# Altium PCB PCB_HBridge.PcbDoc
Units mm, origin at the board's own origin, x right, y up, seen from the top; angles counter-clockwise.
Board outline 66.04 x 61.85 mm, 2 copper layers (Top Layer, Bottom Layer); 56 components, 32 nets, 159 pads, 106 vias.
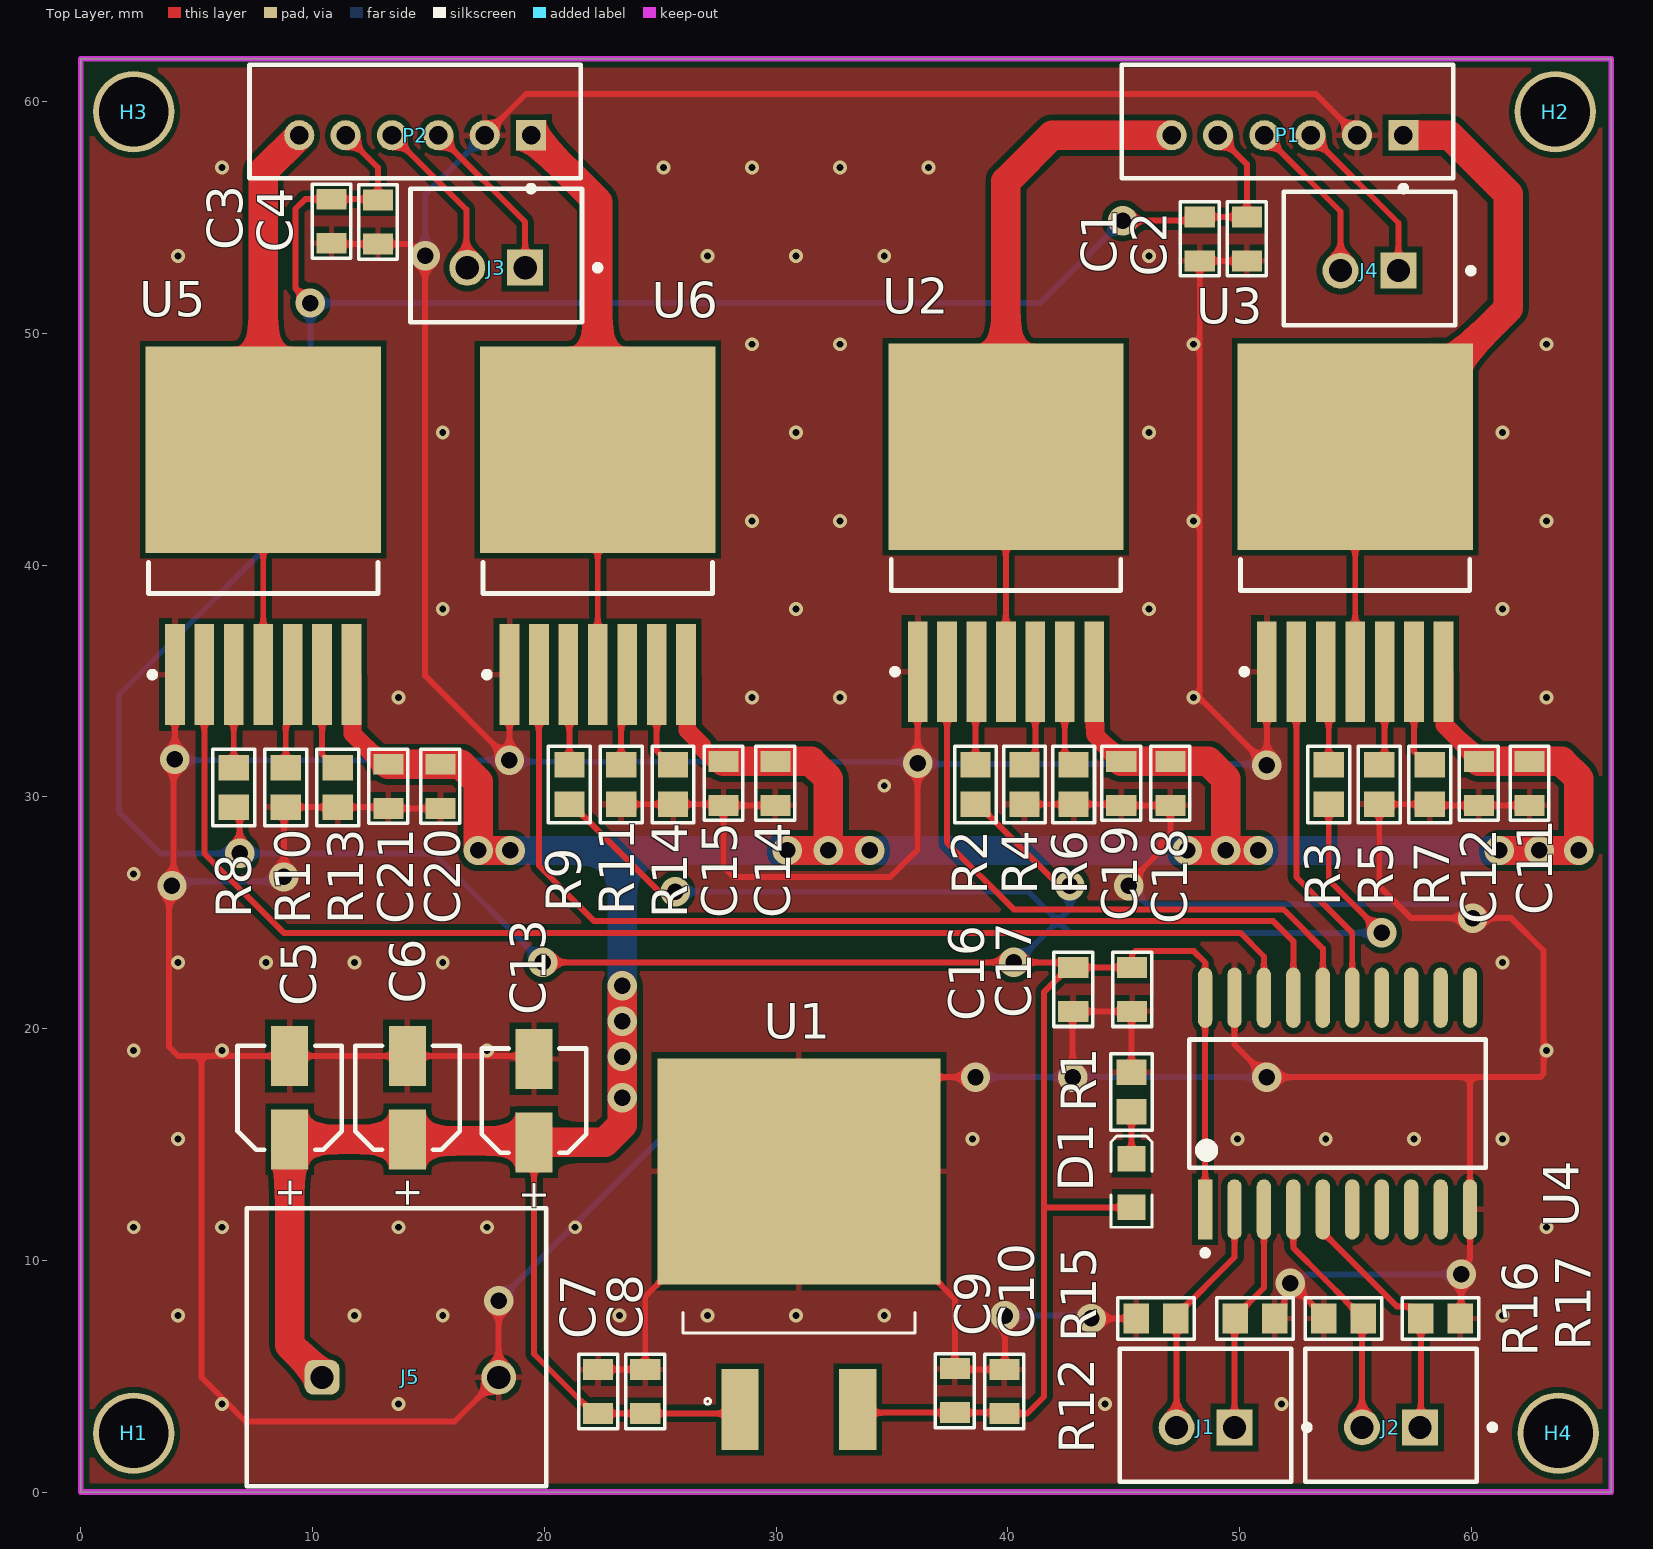
[diagram p0: Top Layer view]
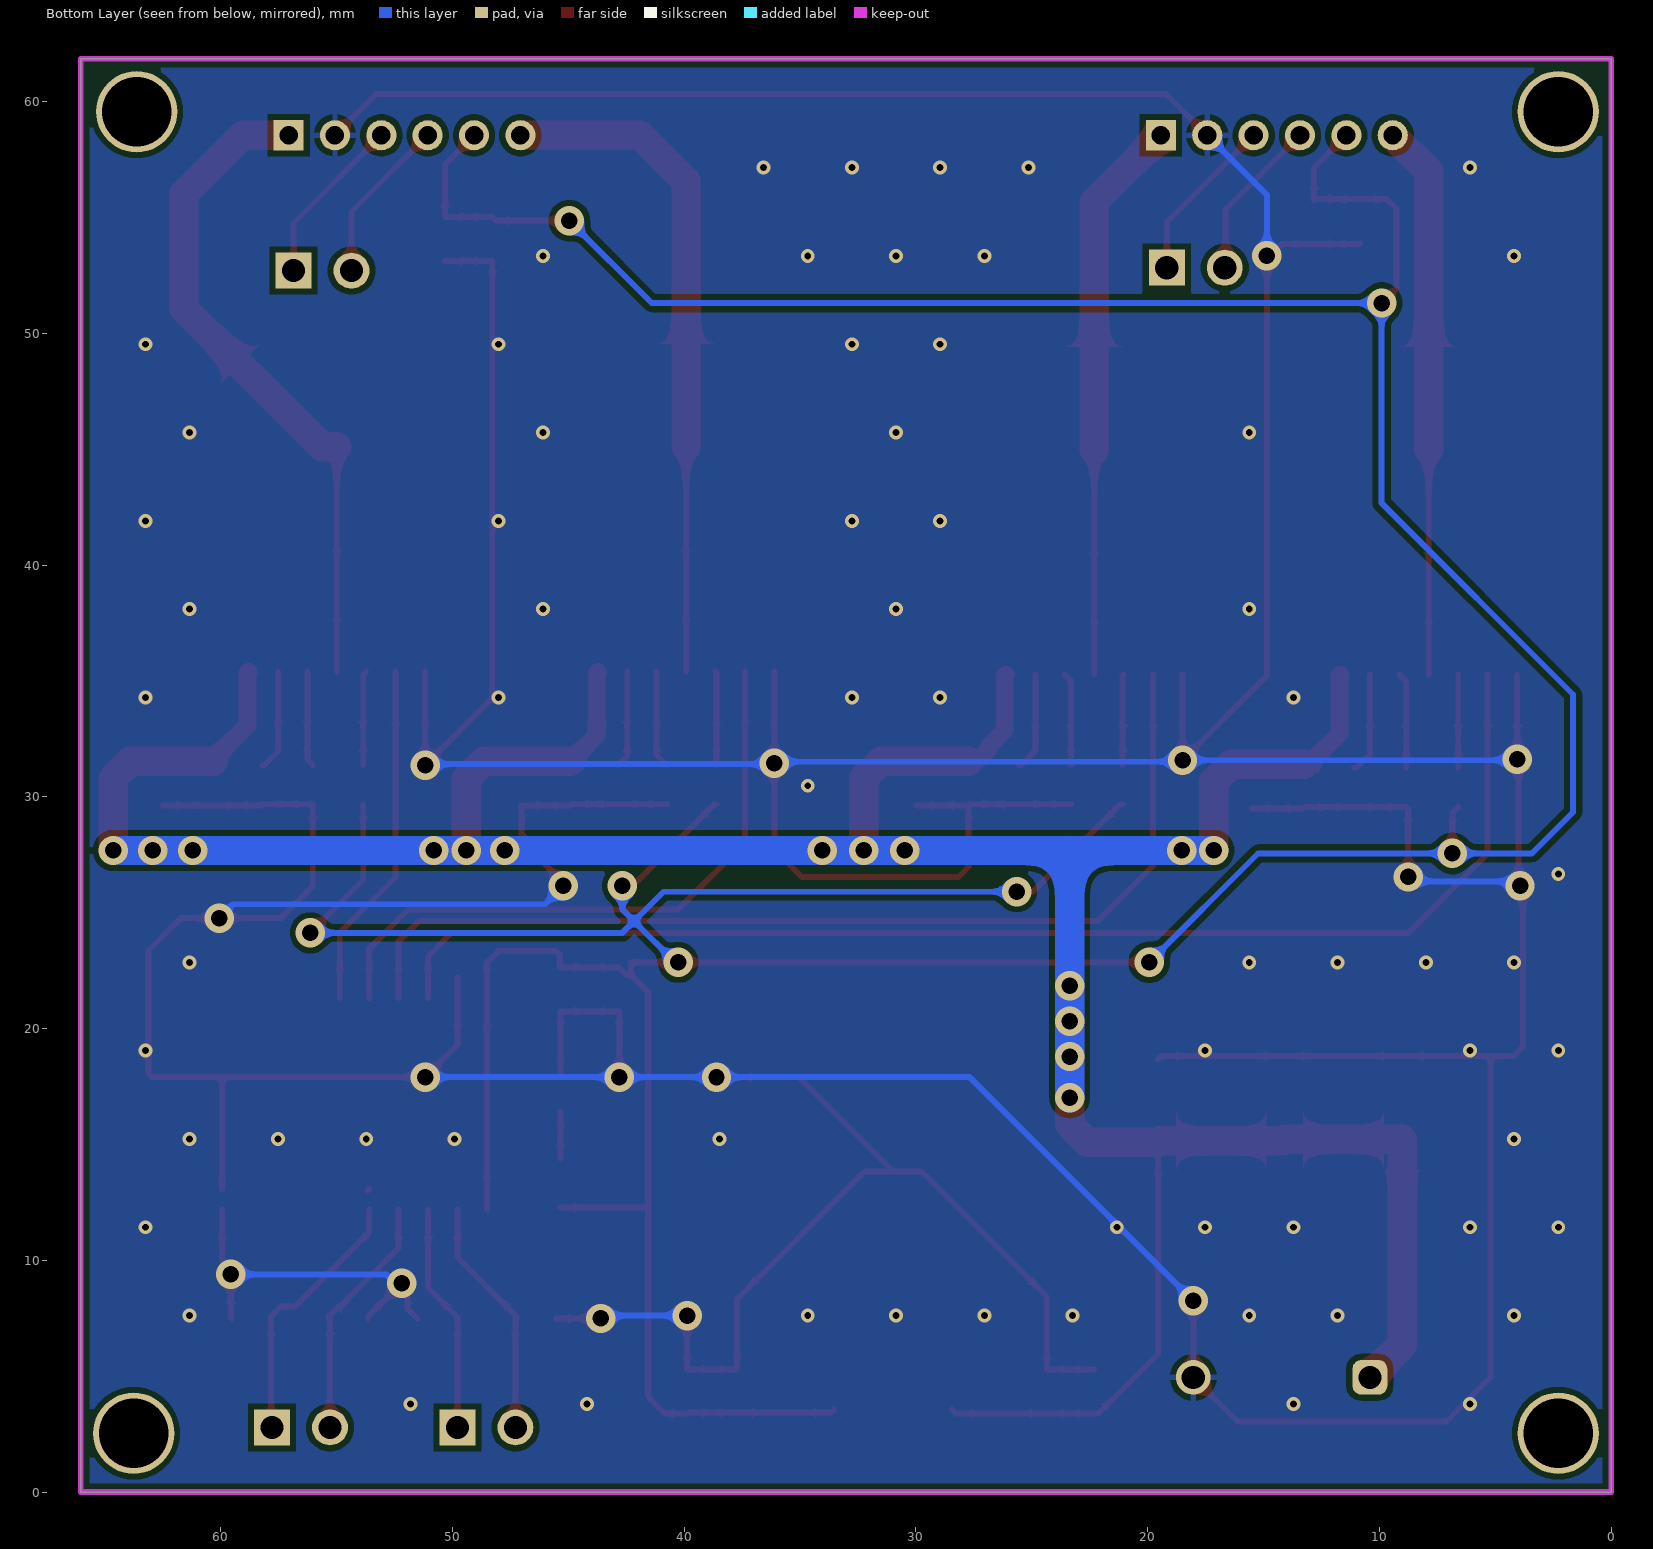
[diagram p1: Bottom Layer view, seen from below]
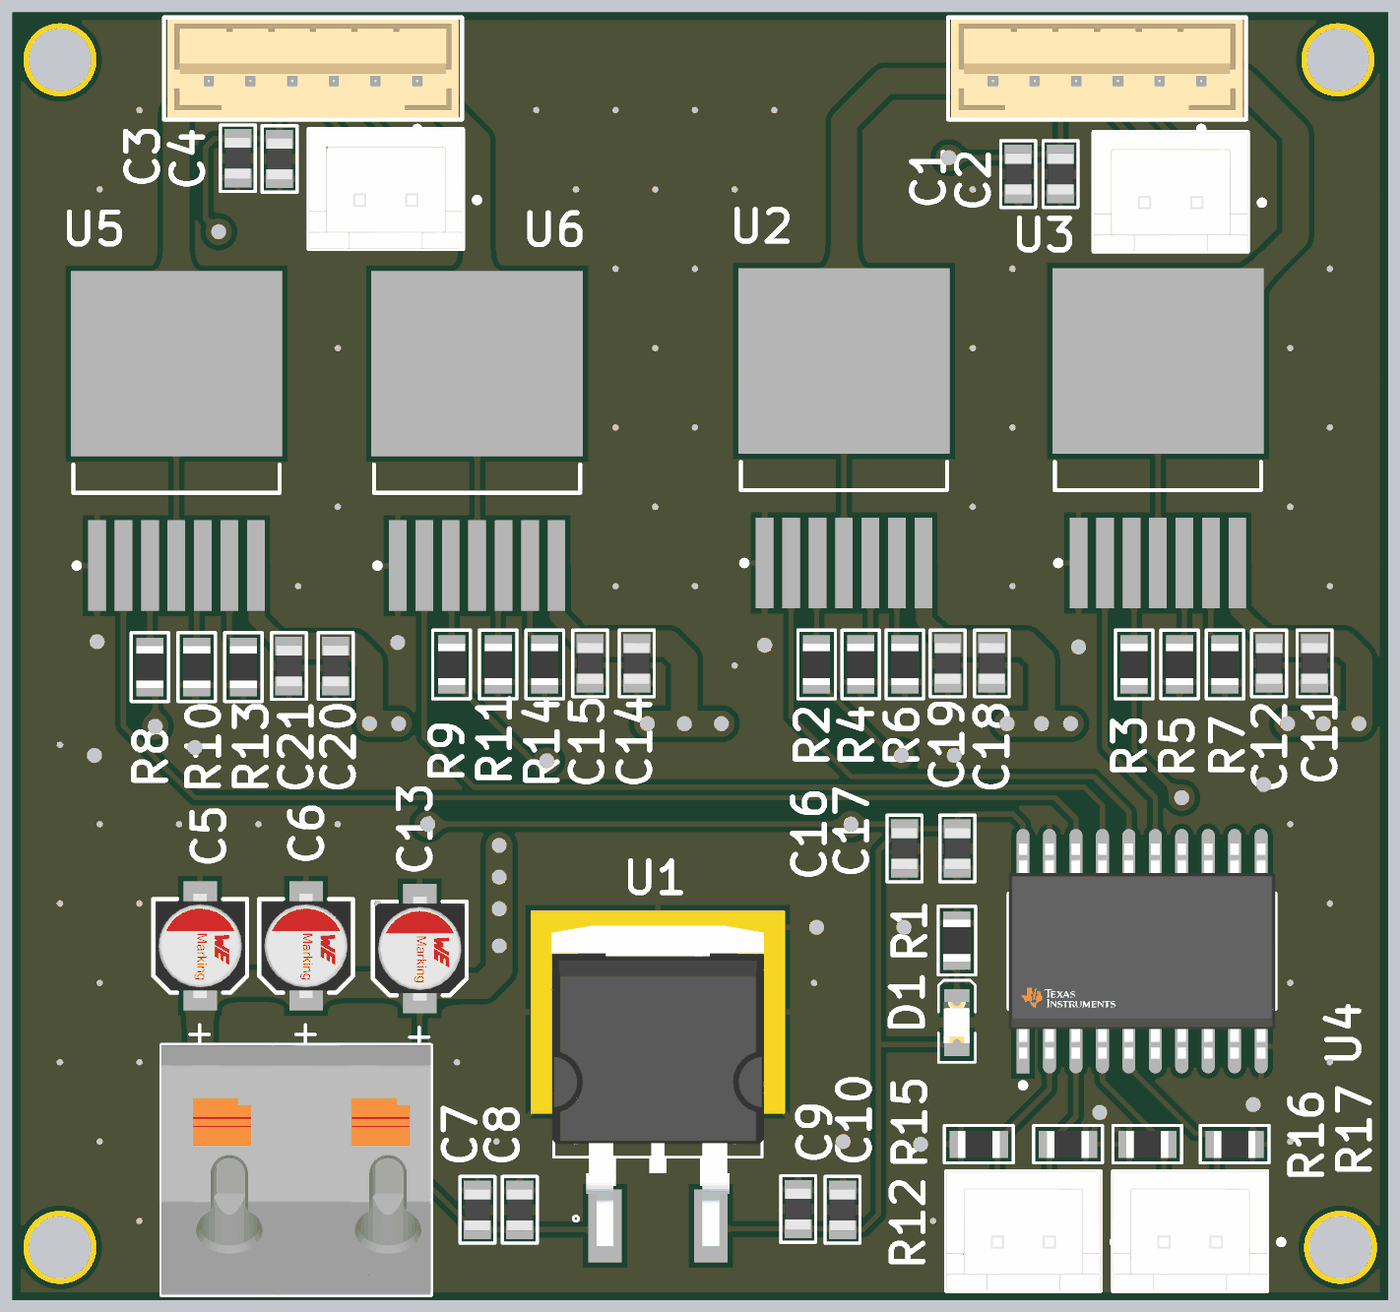
[diagram p2: 3D render of the assembled board from above, using the file's embedded part models]

## Layer stack, top to bottom
Top Solder: solder mask 0.0102, Solder Resist, Dk 3.5
Top Layer: signal copper 0.0356
Dielectric 1: dielectric 0.32, FR-4, Dk 4.8
Bottom Layer: signal copper 0.0356
Bottom Solder: solder mask 0.0102, Solder Resist, Dk 3.5

## Board outline
0,0 0,61.849 66.04,61.849 66.04,0

## Design rules (kind name [scope] priority, off if disabled: settings)
Clearance [All] p1: gap=0.254 ignorepadtopadclearanceinfootprint=FALSE except(0: Arc-Hole Track-Hole SMDPad-Hole THPad-Hole Via-Hole Fill-Hole Poly-Hole Region-Hole Text-Hole)
HoleSize [All] p1: absolutevalues=TRUE maxlimit=0.3 minlimit=0.025 maxpercent=80.000 minpercent=20.000
PolygonConnect [All] p1: thpad.connectstyle=Relief thpad.reliefconductorwidth=0.254 thpad.reliefentries=4 thpad.polygonreliefangle="90 Angle" thpad.airgapwidth=0.254 smdpad.connectstyle=Relief smdpad.reliefconductorwidth=0.254 smdpad.reliefentries=4 smdpad.polygonreliefangle="90 Angle" smdpad.airgapwidth=0.254 via.connectstyle=Direct via.reliefconductorwidth=0.254 via.reliefentries=4 via.polygonreliefangle="90 Angle" via.airgapwidth=0.254
RoutingVias [All] p1: holewidth=0.711 width=1.27 viastyle="Through Hole" minholewidth=0.711 minwidth=1.27 maxholewidth=0.711 maxwidth=1.27
SolderMaskExpansion Via [IsVia] p1: expansion=0.102 istentingtop=TRUE
Width [All] p1: maxlimit=1.27 minlimit=0.254 preferedwidth=0.762 bottomlayer_prefwidth=0.254 minimp=50.000000 maximp=50.000000 favimp=50.000000
29 further rules are at their usual default settings.

## Components (designator, comment, footprint, x,y, rotation, side; value= is the part's Value field where it differs from the comment)
C1 "1 uF, 25 VDC" CAP_0805 48.26,54.102 r90 top
C2 "100 nF, 50 VDC" CAP_0805 50.292,54.102 r90 top value="0.1 nF, 50 VDC"
C3 "1 uF, 25 VDC" CAP_0805 10.795,54.864 r90 top
C4 "100 nF, 50 VDC" CAP_0805 12.802,54.828 r90 top value="0.1 nF, 50 VDC"
C5 "470nF" WCAP-ASLU_D4H5.5 9.017,17.018 r270 top
C6 "4.7uF, 50V" WCAP-ASLI_D4H5.5 14.097,17.018 r270 top
C7 "1 uF, 25 VDC" CAP_0805 22.352,4.318 r270 top
C8 "100 nF, 50 VDC" CAP_0805 24.384,4.318 r270 top value="0.1 nF, 50 VDC"
C9 "1 uF, 25 VDC" CAP_0805 37.744,4.354 r270 top
C10 "100 nF, 50 VDC" CAP_0805 39.878,4.318 r270 top value="0.1 nF, 50 VDC"
C11 "1 uF, 25 VDC" CAP_0805 62.484,30.607 r90 top
C12 "100 nF, 50 VDC" CAP_0805 60.303,30.607 r90 top value="0.1 nF, 50 VDC"
C13 "4.7uF, 50V" WCAP-ASLI_D4H5.5 19.558,16.891 r270 top
C14 "1 uF, 25 VDC" CAP_0805 29.947,30.607 r90 top
C15 "100 nF, 50 VDC" CAP_0805 27.709,30.607 r90 top value="0.1 nF, 50 VDC"
C16 "1 uF, 25 VDC" CAP_0805 42.799,21.717 r90 top
C17 "100 nF, 50 VDC" CAP_0805 45.339,21.717 r90 top value="0.1 nF, 50 VDC"
C18 "1 uF, 25 VDC" CAP_0805 46.99,30.607 r90 top
C19 "100 nF, 50 VDC" CAP_0805 44.873,30.607 r90 top value="0.1 nF, 50 VDC"
C20 "1 uF, 25 VDC" CAP_0805 15.494,30.48 r90 top
C21 "100 nF, 50 VDC" CAP_0805 13.25,30.48 r90 top value="0.1 nF, 50 VDC"
D1 "LED SMD" LED_0805_Blue 45.339,13.335 r90 top
H1 "Hole" "LO KHOAN 3MM" 2.286,2.54 r0 top
H2 "Hole" "LO KHOAN 3MM" 63.627,59.563 r0 top
H3 "Hole" "LO KHOAN 3MM" 2.286,59.563 r0 top
H4 "Hole" "LO KHOAN 3MM" 63.754,2.54 r0 top
J1 "B2B-XH-A(LF)(SN)" FP-B2B-XH-A_LF_SN-MFG 48.534,3.319 r180 top
J2 "B2B-XH-A(LF)(SN)" FP-B2B-XH-A_LF_SN-MFG 56.535,3.319 r180 top
J3 "B2B-XH-A(LF)(SN)" FP-B2B-XH-A_LF_SN-MFG 17.927,53.357 r180 top
J4 "B2B-XH-A(LF)(SN)" FP-B2B-XH-A_LF_SN-MFG 55.606,53.23 r180 top
J5 "4A, 300V" 691418420002 13.629,6.253 r0 top
P1 "2A, 125V(AC)" 62000611622 52.07,59.147 r0 top
P2 "2A, 125V(AC)" 62000611622 14.431,59.147 r0 top
R1 "1 KOhm, 1/8 W" RESISTOR_0805 45.339,17.272 r90 top
R2 "1 KOhm, 1/8 W" RESISTOR_0805 38.608,30.532 r270 top
R3 "1 KOhm, 1/8 W" RESISTOR_0805 53.848,30.532 r270 top
R4 "1 KOhm, 1/8 W" RESISTOR_0805 40.725,30.532 r270 top
R5 "1 KOhm, 1/8 W" RESISTOR_0805 56.029,30.532 r270 top
R6 "1 KOhm, 1/8 W" RESISTOR_0805 42.843,30.532 r270 top
R7 "1 KOhm, 1/8 W" RESISTOR_0805 58.21,30.532 r270 top
R8 "1 KOhm, 1/8 W" RESISTOR_0805 6.604,30.405 r270 top
R9 "1 KOhm, 1/8 W" RESISTOR_0805 21.082,30.532 r270 top
R10 "1 KOhm, 1/8 W" RESISTOR_0805 8.848,30.405 r270 top
R11 "1 KOhm, 1/8 W" RESISTOR_0805 23.32,30.532 r270 top
R12 "1 KOhm, 1/8 W" RESISTOR_0805 46.394,7.493 r0 top
R13 "1 KOhm, 1/8 W" RESISTOR_0805 11.093,30.405 r90 top
R14 "1 KOhm, 1/8 W" RESISTOR_0805 25.558,30.532 r90 top
R15 "1 KOhm, 1/8 W" RESISTOR_0805 50.673,7.493 r180 top
R16 "1 KOhm, 1/8 W" RESISTOR_0805 54.483,7.493 r0 top
R17 "1 KOhm, 1/8 W" RESISTOR_0805 58.674,7.493 r180 top
U1 "5V, 1.5A" TO-263 30.988,10.268 r90 top
U2 "BTS7960B" INF-P-TO-263-7-6_M 39.92,41.402 r90 top
U3 "BTS7960B" INF-P-TO-263-7-6_M 54.991,41.402 r90 top
U4 "SN74HC245DWR" FP-DW0020A-IPC_A 54.229,16.764 r90 top
U5 "BTS7960B" INF-P-TO-263-7-6_M 7.874,41.275 r90 top
U6 "BTS7960B" INF-P-TO-263-7-6_M 22.31,41.275 r90 top

## Footprints (in the part's own frame and the unit in brackets; to place one, negate y for a bottom-side part, rotate by r counter-clockwise, add the part's x,y. Pads: shape width x height; smd on the part's side, far side on the other; paste and mask are expansions set on the pad)
62000611622 [mm] "2.00mm Male Vertical Shrouded Header, 6p"
  rect 1.3x1.3 hole 0.8: 1(5,-0.6)
  round 1.3 hole 0.8: 2(3,-0.6) 3(1,-0.6) 4(-1,-0.6) 5(-3,-0.6) 6(-5,-0.6)
  silkscreen extent -7.15,-3.02 7.15,2.45, body extent -7,-2.35 7,2.35, height 6.13
691418420002 [mm] "7.62 mm 45deg Entry Screwless, 2p"
  rrect50% 1.5x1.5 hole 1: 1(-3.215,-1.3)
  round 1.5 hole 1: 2(4.405,-1.3)
  silkscreen extent -6.47,-6 6.46,6, body extent -6.46,-6 6.47,6, height 13.28
CAP_0805 [mm]
  rect 0.9x1.3 smd: 1(-0.975,-0.025) 2(0.925,-0.025)
  silkscreen extent -1.63,-0.86 1.57,0.81, body extent -1.03,-0.65 0.97,0.6, height 0.6
FP-B2B-XH-A_LF_SN-MFG [mm]
  rect 1.55x1.55 hole 1 paste-1000 mask+0: 1(-1.25,0.525)
  round 1.55 hole 1 paste-1000 mask+0: 2(1.25,0.525)
  silkscreen extent -4.5,-2.88 3.7,2.88, body extent -3.8,-2.98 3.8,2.98, height 0.25
FP-DW0020A-IPC_A [mm]
  rect 2.603x0.622 smd paste+0 mask+0: 1(-4.565,5.715)
  rrect100% 2.603x0.622 smd paste+0 mask+0: 2(-4.565,4.445) 3(-4.565,3.175) 4(-4.565,1.905) 5(-4.565,0.635) 6(-4.565,-0.635) 7(-4.565,-1.905) 8(-4.565,-3.175) 9(-4.565,-4.445) 10(-4.565,-5.715) 11(4.565,-5.715) 12(4.565,-4.445) 13(4.565,-3.175) 14(4.565,-1.905) 15(4.565,-0.635) 16(4.565,0.635) 17(4.565,1.905) 18(4.565,3.175) 19(4.565,4.445) 20(4.565,5.715)
  silkscreen extent -6.57,-6.4 2.76,6.4, body extent -6.37,-6.9 6.37,6.9, height 0.25
INF-P-TO-263-7-6_M [mm] "DPAK, 7-Leads, Body 9.9x9.2mm, Pitch 1.27mm, IPC Low Density"
  rect 4.35x0.85 smd: 1(-6,3.81) 2(-6,2.54) 3(-6,1.27) 4(-6,0) 5(-6,-1.27) 6(-6,-2.54) 7(-6,-3.81)
  rect 8.9x10.15 smd: 8(3.7,0)
  silkscreen extent -6.12,-4.95 -1.15,4.95, body extent -2.5,-4.95 6.9,4.95, height 4.5
LED_0805_Blue [mm]
  rect 1.1x1.2 smd: 1(-1.05,0) 2(1.05,0)
  silkscreen extent -1.91,-0.89 2.03,0.89, body extent -1,-0.63 1,0.62, height 0.68
"LO KHOAN 3MM" [mil]
  round 138 hole 118.1: 1(0,0)
RESISTOR_0805 [mm] "Chip Resistor, 2-Leads, Body 2,00x1,20mm, IPC Medium Density"
  rect 1.1x1.3 smd: 1(-0.85,0) 2(0.85,0)
  silkscreen extent -1.65,-0.9 1.65,0.9, body extent -1,-0.65 1,0.65, height 0.45
TO-263 [mm] "D2PAK"
  rect 3.5x1.6 smd: 1(-6.7,2.54) 2(-6.7,-2.54)
  rect 9.75x12.2 smd paste-7: 3(3.575,0)
  silkscreen extent -6.48,-5 -2.51,5, body extent -7.71,-5.1 7.71,5.1, height 4.6
WCAP-ASLI_D4H5.5 [mm] "Aluminium Electrolytic V-Chip SMT Capacitors, 4x5.5mm"
  rect 2.6x1.6 smd: 1(1.8,0) 2(-1.8,0)
  silkscreen extent -2.25,-2.25 2.25,2.25, body extent -2.5,-2.15 2.5,2.15, height 5.5
WCAP-ASLU_D4H5.5 [mm] "Aluminum Electrolytic Capacitors, body diameter 4mm"
  rect 2.6x1.6 smd: 1(1.8,0) 2(-1.8,0)
  silkscreen extent -2.25,-2.25 2.25,2.25, body extent -2.5,-2.15 2.5,2.15, height 5.5

## Part data
C1 C3 C7 C9 C11 C14 C16 C18 C20: library part 0108051051025, "CAP, size 0805, 1 uF, 25 VDC", Capacitance="1 uF", Manufacture Name=TDK, Manufacture SN=CGA4J1X8R1E105K125AE, Operating Temperature="-55 to +125degC", Tolerance=+/-10%, Voltage Rating DC="25 VDC", ComponentLink2Description=Datasheet, ComponentLink2URL=https://product.tdk.com/system/files/dam/doc/product/capacitor/ceramic/mlcc/catalog/mlcc_automotive_soft_en.pdf?ref_disty=mouser, Mounting Technology=SMT, Packaging="Tape and Reel", Size=0805, Supplier 1 Name=Mouser, Supplier 1 SN=810-A4J1X815K125AE, Supplier 1 URL=https://www.mouser.vn/ProductDetail/TDK/CGA4J1X8R1E105K125AE?qs=Ii670aiJhr6VRhkBsruYJg%3D%3D&utm_source=mouser-refine-download&utm_medium=file&utm_campaign=CGA4J1X8R1E105K125AE&utm_content=TDK, Supplier 2 Name=Digi-Key, Supplier 2 SN=445-174807-2-ND, Supplier 2 URL=https://www.digikey.com/en/products/detail/tdk-corporation/cga4j1x8r1e105k125ae/6556490, Supplier 3 Name=thegioiic, Supplier 3 SN=OEM, Supplier 3 URL=N/A
C2 C4 C8 C10 C12 C15 C17 C19 C21: library part 0108051041050, "CAP, size 0805, 100 nF, 50 VDC", Capacitance="0.1 nF", Manufacture Name=TDK, Manufacture SN=CGA4J2X8R1H104K125AD, Operating Temperature="-55 to +125degC", Tolerance=+/-10%, Voltage Rating DC="50 VDC", ComponentLink2Description=Datasheet, ComponentLink2URL=https://product.tdk.com/system/files/dam/doc/product/capacitor/ceramic/mlcc/catalog/mlcc_automotive_epoxy_en.pdf?ref_disty=mouser, Mounting Technology=SMT, Packaging="Tape and Reel", Size=0805, Supplier 1 Name=Mouser, Supplier 1 SN=810-C2012X8R1H104KEP, Supplier 1 URL=https://www.mouser.vn/ProductDetail/TDK/CGA4J2X8R1H104K125AD?qs=LcTL%2F5vFEzExqZqv3rh1qQ%3D%3D&utm_source=mouser-refine-download&utm_medium=file&utm_campaign=CGA4J2X8R1H104K125AD&utm_content=TDK, Supplier 2 Name=Digi-Key, Supplier 2 SN=445-8810-2-ND, Supplier 2 URL=https://www.digikey.com/en/products/detail/tdk-corporation/cga4j2x8r1h104k125ad/3248169, Supplier 3 Name=thegioiic, Supplier 3 SN=OEM, Supplier 3 URL=N/A
C5: library part CMP-03913-53914652-1, "865090640004 WCAP-ASLU Aluminum Electrolytic Capacitors", Case/Package=Radial, Insulation Resistance=16.6667MΩ, Leakage Current=400nA, Max Operating Temperature=85°C, Min Operating Temperature=-40°C, Ripple Current=4mA, Tolerance=20%, Voltage Rating=50V, Capacitance=470nF, Diameter=4mm, Height=5.5mm, Height - Seated (Max)=5.5118mm, Length=5.5mm, Life (Hours)=1000hours, Material=Aluminium, Mount="Surface Mount", NexarPartId=53914652, Packaging="Tape & Reel (TR)", Polarity=Polar, REACH SVHC=Unknown, Ripple Current (AC)=4mA, RoHS=Compliant, Voltage Rating (DC)=50V, Width=4.3mm
C6 C13: library part 865080640004, "V-Chip, D4 x H5.5mm, 4.7uF, 50V", Capacitance=4.7uF, Capacitance Tolerance=+/-20%, Leakage Current=3uA, Manufacturer="Wurth Elektronik", Manufacturer Part Number=N/A, Operating Temperature Max=105°C, Operating Temperature Min=-55°C, Rated Voltage (DC)=50V, Ripple Current=55mA, Category="Aluminum Electrolytic Capacitors", ComponentLink2Description="Datasheet Link", ComponentLink2URL=https://www.we-online.com/redexpert/spec/865080640004?ad, Diameter=4mm, Dissipation Factor=12%, Endurance=2000h, Height=5.5mm, Mount="Surface Mount", Packaging="Tape and Reel", Supplier 1 Name=Mouser, Supplier 1 SN=710-865080640004, Supplier 1 URL=https://www.mouser.vn/ProductDetail/Wurth-Elektronik/865080640004?qs=0KOYDY2FL2%2FjY4kqBxIvAg%3D%3D, Supplier 2 Name=Digi-Key, Supplier 2 SN=N/A, Supplier 2 URL=N/A, Supplier 3 Name=thegioiic, Supplier 3 SN=N/A, Supplier 3 URL=https://www.thegioiic.com/product/tu-hoa-nhom?prid=6714,5972
D1: "LED"
H1 H2 H3 H4: "Hole 3mm"
J1 J2 J3 J4: library part CMP-2000-05888-3, "CONN HEADER VERT 2POS 2.5MM", Color=Natural, Contact Resistance=20mR, Current Rating=3A, Housing Color=White, Insulation Resistance=1GR, Max Operating Temperature=85°C, Max Voltage Rating (AC)=250V, Min Operating Temperature=-25°C, Connector Type="Male Pin", Contact Material=Brass, Contact Plating=Tin, Contact Type="Male Pin", Depth=5.75mm, Fastening Type=Detent, Housing Material=Polyamide, Lead Free="Lead Free", Lead Pitch=2.5mm, Length=7.4mm, Max Current Rating=3A, Max Voltage Rating (DC)=250V, Mount="Through Hole", Number of Contacts=2, Number of Positions=2, Number of Rows=1, Orientation=Straight, Packaging=Bulk, Pitch=2.5mm, REACH SVHC="No SVHC", Series=XH, Termination=Solder, Voltage Rating=250V, Voltage Rating (AC)=250V, Wire/Cable Gauge=22AWG
J5: library part 691418420002, "WR-TBL Series 4184 45° Entry, THT, pitch 7.62mm, 2p", Manufacturer="Wurth Elektronik", Operating Temperature Max=120°C, Operating Temperature Min=-30°C, Rated Current=4A, Working Voltage=300V, Application=Screwless, Category="Terminal Blocks", ComponentLink1Description="Datasheet Link", ComponentLink1URL=https://www.we-online.com/redexpert/spec/691418420002?ad, ComponentLink2Description="Supplier 1 URL", ComponentLink2URL=N/A, ComponentLink3Description="Supplier 2 URL", ComponentLink3URL=N/A, ComponentLink4Description="Supplier 3 URL", ComponentLink4URL=https://www.thegioiic.com/hb762-2-terminal-khoi-han-pcb-2-cuc-24a-450v-7-62mm, Manufacturer Part Number=691418420002, Match Code=WR-TBL, Modularity=No, Mount="Through Hole", Number of Pins=2, Number of Rows=1, Orientation=45°, Packaging=Box, Pitch=7.62mm, Supplier 1 Name=Mouser, Supplier 1 SN=N/A, Supplier 1 URL=N/A, Supplier 2 Name=Digi-Key, Supplier 2 SN=N/A, Supplier 2 URL=N/A, Supplier 3 Name=thegioiic, Supplier 3 SN=N/A, Supplier 3 URL=https://www.thegioiic.com/hb762-2-terminal-khoi-han-pcb-2-cuc-24a-450v-7-62mm
P1 P2: library part 62000611622, "WR-WTB Male Vertical Shrouded Header, pitch 2mm, 6p", Contact Resistance=20mOhm, Operating Temperature="-25 to +85degC", Rated Current=2A, Withstanding Voltage=800VAC, Working Voltage=125VAC, ComponentLink1Description=Manufacturer, ComponentLink1URL=http://www.we-online.de, ComponentLink2Description=Datasheet, ComponentLink2URL=https://www.we-online.com/catalog/datasheet/62000611622.pdf, ComponentLink3Description="Global Supply", ComponentLink3URL=https://www.we-online.com/en/components/products/WTB_2_00_MALE_VERTICAL_SHROUDED_HEADER_6200XX11622?sq=62000611622#62000611622, ComponentLink4Description="Global Supply", ComponentLink4URL=https://www.mouser.vn/ProductDetail/Wurth-Elektronik/62000611622?qs=ulEaXIWI0c%2F38WR3e0VejA%3D%3D, Gender=Male, Mounting Technology=THT, Packaging=Bag, Part Number=62000611622, Pin Number=6, Pitch=2mm, Published Date="January 2020", Publisher="Wurth Elektronik", Supplier 1 Name=Mouser, Supplier 1 SN=710-62000611622, Supplier 1 URL=https://www.mouser.vn/ProductDetail/Wurth-Elektronik/62000611622?qs=ulEaXIWI0c%2F38WR3e0VejA%3D%3D, Supplier 2 Name=Digi-Key, Supplier 2 SN=N/A, Supplier 2 URL=N/A, Supplier 3 Name=thegioiic, Supplier 3 SN=N/A, Supplier 3 URL=N/A, Type=Vertical
R1 R2 R3 R4 R5 R6 R7 R8 R9 R10 R11 R12 R13 R14 R15 R16 R17: library part 0008051021, "RES, size 0805, 1 KOhm, 1/8 W", Manufacture  Name="Vishay Dale", Manufacture  SN=M55342K06B1E00RS3, Rated Power="1/8 W", Resistance="1 KOhm", Resistance Tolerance=+/-1%, ComponentLink1Description="Datasheet link", ComponentLink1URL=https://www.vishay.com/docs/31010/rcwpm.pdf, ComponentLink2Description="Supplier 1 URL", ComponentLink2URL=N/A, ComponentLink3Description="Supplier 2 URL", ComponentLink3URL=https://www.digikey.com/en/products/detail/vishay-dale/M55342K06B1E00RS3/2941798, ComponentLink4Description="Supplier 3 URL", ComponentLink4URL=https://www.thegioiic.com/dien-tro-1-kohm-0805-1, Mounting Technology=SMT, Size=0805, Supplier 1 Name=Mouser, Supplier 1 SN=N/A, Supplier 1 URL=N/A, Supplier 2 Name=Digi-Key, Supplier 2 SN=1135-1001-2-ND, Supplier 2 URL=https://www.digikey.com/en/products/detail/vishay-dale/M55342K06B1E00RS3/2941798, Supplier 3 Name=Thegioiic, Supplier 3 SN=N/A, Supplier 3 URL=https://www.thegioiic.com/dien-tro-1-kohm-0805-1
U1: library part L7805ACD2T_TO-263, "Out: 5V, 1.5A; In: 7V to 35V; Pacakge: TO-263", Output Current=1.5A, Package=TO-263, Voltage Input Maximum="7V to 35V", Voltage Output=5V, ComponentLink1Description="Datasheet link", ComponentLink1URL=https://www.st.com/resource/en/datasheet/l78.pdf, ComponentLink2Description="Supplier 1 URL", ComponentLink2URL=https://www.mouser.com/ProductDetail/STMicroelectronics/L7805ACD2T-TR?qs=Ctxo64yJVFuOLXlPPZdJUQ%3D%3D, ComponentLink3Description="Supplier 2 URL", ComponentLink3URL=https://www.digikey.com/en/products/detail/stmicroelectronics/L7805ACD2T-TR/1038230, ComponentLink4Description="Supplier 3 URL", ComponentLink4URL=https://www.thegioiic.com/l7805acd2t-ic-on-ap-5v-1-5a, Supplier 1 Name=Mouser, Supplier 1 SN=511-L7805ACD2T-TR, Supplier 1 URL=https://www.mouser.com/ProductDetail/STMicroelectronics/L7805ACD2T-TR?qs=Ctxo64yJVFuOLXlPPZdJUQ%3D%3D, Supplier 2 Name=Digi-Key, Supplier 2 SN=497-7253-2-ND, Supplier 2 URL=https://www.digikey.com/en/products/detail/stmicroelectronics/L7805ACD2T-TR/1038230, Supplier 3 Name=thegioiic, Supplier 3 SN=N/A, Supplier 3 URL=https://www.thegioiic.com/l7805acd2t-ic-on-ap-5v-1-5a
U2 U3 U5 U6: library part CMP-1114-00025-1, "High Current PN Half Bridge NovalithIC, -40 to 150 degC, P-TO-263-7-6", Manufacturer=Infineon, ComponentLink1Description="Manufacturer URL", ComponentLink1URL=http://www.infineon.com/, ComponentLink2Description=Datasheet, ComponentLink2URL=http://www.infineon.com/dgdl/BTS7960_Datasheet.pdf?folderId=db3a304412b407950112b408e8c90004&fileId=db3a304412b407950112b43945006d5d&location=en.Products.Automotive_ICs.Motor_Drivers__Automotive_.Integrated_High_Current_Motor_Drivers__NovalithIC____Trilith, ComponentLink3Description="Package Specification", ComponentLink3URL=http://www.infineon.com/dgdl/BTS7970B_Datasheet.pdf?folderId=db3a304412b407950112b408e8c90004&fileId=db3a304412b407950112b43949b36d61&sId=db3a30433d68e984013d7db637dc5e6a, DatasheetVersion="Rev. 1.1", Green=FALSE, Halogen-free=FALSE, Iq (typ)="7 uA", Mounting Technology="Surface Mount", PackageDescription="7-Pin Plastic Transistor Single Outline Package, 9.9 x 9.2 mm Body, 1.27 mm Pitch", PackageReference=P-TO-263-7-6, PackageVersion=May-06, PartNumber=BTS7960B, RevisionNote="Re-Activated Devices"
U4: library part CMP-1620-00193-3, "IC TRANSCVR NON-INVERT 6V 20SOIC", Case/Package=SOIC, High Level Output Current=-7.8mA, Low Level Output Current=7.8mA, Max Operating Temperature=85°C, Max Supply Voltage=6V, Min Operating Temperature=-40°C, Min Supply Voltage=2V, Operating Supply Voltage=5V, Package Quantity=1, Quiescent Current=8uA, Contact Plating=Gold, Direction=Bidirectional, Height=2.35mm, Lead Free="Lead Free", Length=12.8mm, Logic Function=Transceiver, Mount="Surface Mount", Number of Bits=8, Number of Bits per Element=8, Number of Channels=8, Number of Circuits=8, Number of Elements=1, Number of Outputs=8, Number of Pins=20, Packaging="Tape and Reel", Polarity=Non-Inverting, Propagation Delay=335ns, Radiation Hardening=No, REACH SVHC="No SVHC", RoHS Compliant=Yes, Turn-On Delay Time=335ns, Weight=0.017662oz, Width=7.52mm

## Via types
v1: diameter 0.6, hole 0.3, Top Layer to Bottom Layer, tented both sides, 66 vias
v2: diameter 1.27, hole 0.711, Top Layer to Bottom Layer, tented both sides, 40 vias

## Nets (pads, with @x,y where several pads share a name; then routed paths per layer and width w, separated by ;. In a path a pad name is that pad's centre, name@x,y a point inside that pad or via, vN(x,y) a via of type N, cw(c..) or ccw(c..) an arc to the next point about the centre after c; other vN are vias at no path point)
5V: C1.2 C2.2 C3.2 C4.2 C9.2 C10.2 C16.2 C17.2 D1.1 P1.5 P2.5 R2.2 R3.2 R8.2 R9.2 U1.2 U4.1 U4.20 | length 231.1
  Top Layer w0.254: R8.2 6.858,29.301 v2(6.858,27.559) ; v2(9.906,51.308) 9.271,51.943 9.271,55.372 9.688,55.789 C3.2 12.791,55.789 C4.2 12.827,57.151 P2.5 ; v2(19.939,22.86) 42.301,22.86 C16.2@42.301,22.319 ; R9.2 21.182,29.682 24.956,25.908 v2(25.654,25.908) ; U1.2 33.667,3.429 C9.2 39.817,3.429 C10.2 40.837,3.393 41.569,4.126 41.569,12.319 ; R2.2 38.708,29.682 42.033,26.356 42.478,26.356 v2(42.672,26.162) ; v2(44.958,54.864) 48.123,54.864 C1.2 C2.2 50.317,57.3 P1.5 ; D1.1 41.603,12.285 41.569,12.319 ; U4.1 U4.20 48.514,22.86 48.031,23.343 45.513,23.343 45.364,23.194 C17.2 C16.2 42.501,22.319 C16.2@42.301,22.319 ; R3.2 53.848,26.416 v2(56.134,24.13) ; 41.569,12.319 41.569,21.586 C16.2@42.301,22.319
  Bottom Layer w0.254: v2(19.939,22.86) 15.24,27.559 3.429,27.559 1.651,29.337 1.651,34.417 9.906,42.672 v2(9.906,51.308) 41.402,51.308 v2(44.958,54.864) ; v2(25.654,25.908) 40.894,25.908 42.164,24.638 ; v2(40.259,22.86) 40.386,22.86 42.164,24.638 ; v2(42.672,26.162) 42.672,25.146 42.164,24.638 ; v2(56.134,24.13) 42.672,24.13 42.164,24.638
GND: C1.1 C2.1 C3.1 C4.1 C5.2 C6.2 C7.1 C8.1 C9.1 C10.1 C11.1 C12.1 C13.2 C14.1 C15.1 C16.1 C17.1 C18.1 C19.1 C20.1 C21.1 J5.2 P1.2 P2.2 R1.2 R4.2 R5.2 R6.2 R7.2 R10.2 R11.2 R12.1 R13.1 R14.1 R15.1 R16.1 R17.1 U1.3 U2.1 U3.1 U4.10 U4.19 U5.1 U6.1 | length 435
  Top Layer w0.254: U5.1 v2(4.064,31.623) 4,31.559 4,26.226 3.81,26.035 3.81,19.221 4.213,18.818 5.207,18.818 ; v2(8.763,26.543) 8.763,29.47 R10.2 R13.1 13.225,29.555 C21.1 C20.1 ; C3.1 10.856,53.853 14.202,53.853 14.715,53.34 v2(14.859,53.34) 14.859,35.221 v2(18.5,31.581) U6.1 ; P2.2 19.209,60.325 53.292,60.325 P1.2 ; v2(18.034,8.255) J5.2 16.129,3.048 7.112,3.048 6.223,3.937 5.207,4.953 5.207,18.818 ; C13.2 19.431,18.818 C6.2 C5.2 5.207,18.818 ; C7.1 C8.1 24.359,8.439 29.763,13.843 U1.3 ; R11.2 R14.1 27.684,29.682 C15.1 ; C14.1 C15.1 ; U2.1 v2(36.11,31.454) 36.11,27.728 34.925,26.543 28.163,26.543 27.734,26.972 C15.1 ; v2(38.608,17.907) 35.052,17.907 U1.3 ; v2(39.878,7.62) 39.878,5.319 C10.1 37.755,5.293 C9.1 37.719,8.337 32.213,13.843 U1.3 ; R4.2 R6.2 44.848,29.682 C19.1 C18.1 47.015,28.386 46.609,27.98 46.609,27.686 45.212,26.289 v2(45.212,26.162) ; v2(42.799,17.907) 42.799,20.716 C16.1 C17.1 45.339,20.716 R1.2 ; v2(43.6,7.493) R12.1 ; U4.19@49.784,22.218 49.784,19.304 v2(51.181,17.907) 59.944,17.907 ; C2.1 C1.1 48.285,34.265 v2(51.181,31.369) U3.1 ; R15.1 51.946,7.916 51.946,8.403 ; v2(52.197,9.017) 52.209,9.017 53.633,7.593 R16.1 ; R17.1 59.563,7.532 v2(59.563,9.398) 59.563,9.673 59.944,10.054 U4.10 ; U4.10@59.944,13.088 59.944,17.907 ; C11.1 C12.1 58.26,29.632 R7.2 R5.2 56.029,26.14 57.404,24.765 v2(60.071,24.765) 61.722,24.765 63.119,23.368 63.119,18.056 62.97,17.907 59.944,17.907
  Bottom Layer w0.254: v2(3.937,26.162) 4.127,26.352 8.572,26.352 v2(8.763,26.543) ; v2(4.064,31.623) 4.106,31.581 v2(18.5,31.581) 18.563,31.517 36.047,31.517 v2(36.11,31.454) 36.153,31.411 51.139,31.411 v2(51.181,31.369) ; v2(14.859,53.34) 14.859,55.975 P2.2 ; v2(18.034,8.255) 27.686,17.907 v2(38.608,17.907) v2(42.799,17.907) v2(51.181,17.907) ; v2(39.878,7.62) v2@43.688,7.62 ; v2(45.212,26.162) 46.008,25.366 59.47,25.366 v2(60.071,24.765) ; v2(52.197,9.017) 52.472,9.017 52.853,9.398 v2(59.563,9.398)
  other v1: 6.096,3.81 13.716,3.81 44.196,3.81 51.816,3.81 4.191,7.62 11.811,7.62 15.621,7.62 23.241,7.62 27.051,7.62 30.861,7.62 34.671,7.62 61.341,7.62 2.286,11.43 6.096,11.43 13.716,11.43 17.526,11.43 21.336,11.43 63.246,11.43 4.191,15.24 38.481,15.24 49.911,15.24 53.721,15.24 57.531,15.24 61.341,15.24 2.286,19.05 6.096,19.05 17.526,19.05 63.246,19.05 4.191,22.86 8.001,22.86 11.811,22.86 15.621,22.86 61.341,22.86 2.286,26.67 34.671,30.48 13.716,34.29 28.956,34.29 32.766,34.29 48.006,34.29 63.246,34.29 15.621,38.1 30.861,38.1 46.101,38.1 61.341,38.1 28.956,41.91 32.766,41.91 48.006,41.91 63.246,41.91 15.621,45.72 30.861,45.72 46.101,45.72 61.341,45.72 28.956,49.53 32.766,49.53 48.006,49.53 63.246,49.53 4.191,53.34 27.051,53.34 30.861,53.34 34.671,53.34 46.101,53.34 6.096,57.15 25.146,57.15 28.956,57.15 32.766,57.15 36.576,57.15
NetD1_2: D1.2 R1.1 | length 2
  Top Layer w0.254: D1.2 R1.1
NetJ1_1: J1.1 R15.2 U4.3 | length 9.9
  Top Layer w0.254: J1.1 49.784,7.554 51.054,8.824 U4.3
NetJ1_2: J1.2 R12.2 U4.2 | length 10.5
  Top Layer w0.254: J1.2 47.284,7.453 R12.2 47.244,7.593 49.784,10.133 U4.2
NetJ2_1: J2.1 R17.2 U4.5 | length 11.6
  Top Layer w0.254: U4.5 53.594,11.208 56.786,8.016 57.401,8.016 57.824,7.593 R17.2 57.824,2.833 J2.1 ; U4.5@53.594,13.088 U4.5@53.66,13.021
NetJ2_2: J2.2 R16.2 U4.4 | length 10.7
  Top Layer w0.254: U4.4 52.324,10.541 53.686,9.179 54.564,8.301 54.564,8.262 54.81,8.016 54.91,8.016 55.333,7.593 R16.2 55.285,7.445 J2.2
NetJ3_1: J3.1 P2.3 | length 7.4
  Top Layer w0.254: P2.3 15.431,58.356 15.622,58.356 19.177,54.801 J3.1
NetJ3_2: J3.2 P2.4 | length 7.1
  Top Layer w0.254: P2.4 16.637,55.341 16.637,52.872 J3.2
NetJ4_1: J4.1 P1.3 | length 7.5
  Top Layer w0.254: P1.3 53.07,58.309 53.308,58.309 56.856,54.761 J4.1
NetJ4_2: J4.2 P1.4 | length 7.2
  Top Layer w0.254: P1.4 54.356,55.261 J4.2
NetP1_1: P1.1 U3.4 U3.8 | length 29.3
  Top Layer w0.254: U3.4 U3.8
  Top Layer w1.27: U3.8 55.616,45.102 61.595,51.081 61.595,56.007 59.055,58.547 P1.1
NetP1_6: P1.6 U2.4 U2.8 | length 29.1
  Top Layer w0.254: U2.4 U2.8
  Top Layer w1.27: U2.8 39.92,56.557 41.91,58.547 P1.6
NetP2_1: P2.1 U6.4 U6.8 | length 24.5
  Top Layer w0.254: U6.4 U6.8
  Top Layer w1.27: P2.1 22.31,55.668 U6.8
NetP2_6: P2.6 U5.4 U5.8 | length 23.9
  Top Layer w0.254: U5.4 U5.8
  Top Layer w1.27: U5.8 7.874,56.982 9.431,58.539 P2.6
NetR2_1: R2.1 U2.3 | length 4
  Top Layer w0.254: R2.1 38.608,35.36 U2.3
NetR3_1: R3.1 U3.3 | length 4.1
  Top Layer w0.254: U3.3 53.848,35.275 R3.1
NetR4_1: R4.1 U2.5 | length 4.2
  Top Layer w0.254: R4.1 40.767,31.382 41.19,31.805 U2.5
NetR5_1: R5.1 U3.5 | length 4.1
  Top Layer w0.254: R5.1 56.261,31.614 U3.5
NetR6_1: R6.1 U2.6 | length 4.2
  Top Layer w0.254: U2.6 42.46,31.764 R6.1
NetR7_1: R7.1 U3.6 | length 4.4
  Top Layer w0.254: U3.6 57.531,31.96 58.11,31.382 R7.1
NetR8_1: R8.1 U5.3 | length 4
  Top Layer w0.254: R8.1 U5.3
NetR9_1: R9.1 U6.3 | length 3.9
  Top Layer w0.254: U6.3 21.082,35.233 R9.1
NetR10_1: R10.1 U5.5 | length 4.1
  Top Layer w0.254: R10.1 8.848,34.979 U5.5
NetR11_1: R11.1 U6.5 | length 4
  Top Layer w0.254: R11.1 23.32,35.015 U6.5
NetR13_2: R13.2 U5.6 | length 4.4
  Top Layer w0.254: U5.6 10.414,31.833 10.993,31.255 R13.2
NetR14_2: R14.2 U6.6 | length 4.2
  Top Layer w0.254: U6.6 24.85,31.99 25.458,31.382 R14.2
NetU2_2: U2.2 U4.16 | length 27.6
  Top Layer w0.254: U2.2 37.38,28.025 40.259,25.146 51.9,25.146 53.594,23.452 U4.16
NetU3_2: U3.2 U4.15 | length 15.1
  Top Layer w0.254: U3.2 52.451,26.543 54.864,24.13 U4.15
NetU4_17: U4.17 U6.2 | length 44.6
  Top Layer w0.254: U6.2 19.77,27.025 22.157,24.638 51.455,24.638 52.324,23.769 U4.17
NetU4_18: U4.18 U5.2 | length 57.1
  Top Layer w0.254: U5.2 5.334,27.559 8.763,24.13 50.038,24.13 51.054,23.114 U4.18
VCC: C5.1 C6.1 C7.2 C8.2 C11.2 C12.2 C13.1 C14.2 C15.2 C18.2 C19.2 C20.2 C21.2 J5.1 U1.1 U2.7 U3.7 U5.7 U6.7 | length 170.4
  Top Layer w0.254: C13.1 19.558,5.962 22.127,3.393 C7.2 C8.2 28.273,3.393 U1.1
  Top Layer w0.762: U5.7 11.728,35.231 11.728,32.722 12.976,31.474 13.206,31.474 C21.2 ; U6.7 26.164,35.231 26.164,32.874 26.843,32.195 26.843,32.085 27.327,31.601 27.665,31.601 C15.2 ; U2.7 43.774,35.358 43.774,32.655 44.629,31.801 44.629,31.601 44.698,31.532 C19.2 ; U3.7 58.845,35.358 58.845,33.103 60.06,31.888 60.06,31.601 60.129,31.532 C12.2
  Top Layer w1.27: J5.1 9.017,6.35 C5.1 C6.1 14.16,15.154 19.494,15.154 C13.1 22.602,15.091 23.368,15.857 v2(23.368,17.018) v2(23.368,18.796) v2(23.368,21.844) v2(23.368,20.32) ; C21.2 C20.2 16.401,31.405 17.145,30.661 v2(17.145,27.686) v2(18.542,27.686) ; C15.2 31.514,31.532 32.258,30.788 v2(32.258,27.686) ; v2(30.48,27.686) v2(32.258,27.686) ; v2(34.036,27.686) v2(32.258,27.686) ; C19.2 C18.2 48.659,31.532 49.403,30.788 v2(49.403,27.686) ; v2(47.752,27.686) v2(49.403,27.686) ; v2(50.8,27.686) v2(49.403,27.686) ; C12.2 C11.2 63.899,31.532 64.643,30.788 v2(64.643,27.686) v2(62.928,27.686) v2(61.214,27.686)
  Bottom Layer w1.27: v2(17.145,27.686) v2(18.542,27.686) 23.368,27.686 ; v2(23.368,17.018) v2(23.368,18.796) 23.368,27.686 ; v2(61.214,27.686) v2(50.8,27.686) v2(49.403,27.686) v2(47.752,27.686) v2(34.036,27.686) v2(32.258,27.686) v2(30.48,27.686) 23.368,27.686 ; v2@61.341,27.686 v2(62.928,27.686) v2@64.262,27.686
pads on no net: H1.1 H2.1 H3.1 H4.1 U4.6 U4.7 U4.8 U4.9 U4.11 U4.12 U4.13 U4.14

## Polygon pours and split planes (outlines as drawn)
GND on Top Layer "GND_L01_P000" (solid, remove dead copper, pour order 0): 0,0.127 65.913,0.127 65.913,61.722 0,61.722
GND on Bottom Layer "GND_L02_P001" (solid, remove dead copper, pour order 1): 0,0 0,61.849 66.04,61.849 66.04,0

## Keep-outs
Keep-Out Layer:
  the board outline again, w0.254

## Text inside footprints (layer, text, board x,y; h text height)
C5: Top Overlay "+" at 8.517,13.618 h1.22 r270
C6: Top Overlay "+" at 13.597,13.618 h1.22 r270
C13: Top Overlay "+" at 19.058,13.491 h1.22 r270